# Altium PCB PCB2.PcbDoc (part 7 of 7)
Units mm, origin at the board's own origin, x right, y up, seen from the top; angles counter-clockwise.
Board outline 49 x 45 mm, 6 copper layers (Component Side, GND1, 3.3V, 1.2V, GND2, Solder Side), stack 1.629 mm thick; 56 components, 116 nets, 925 pads, 478 vias.
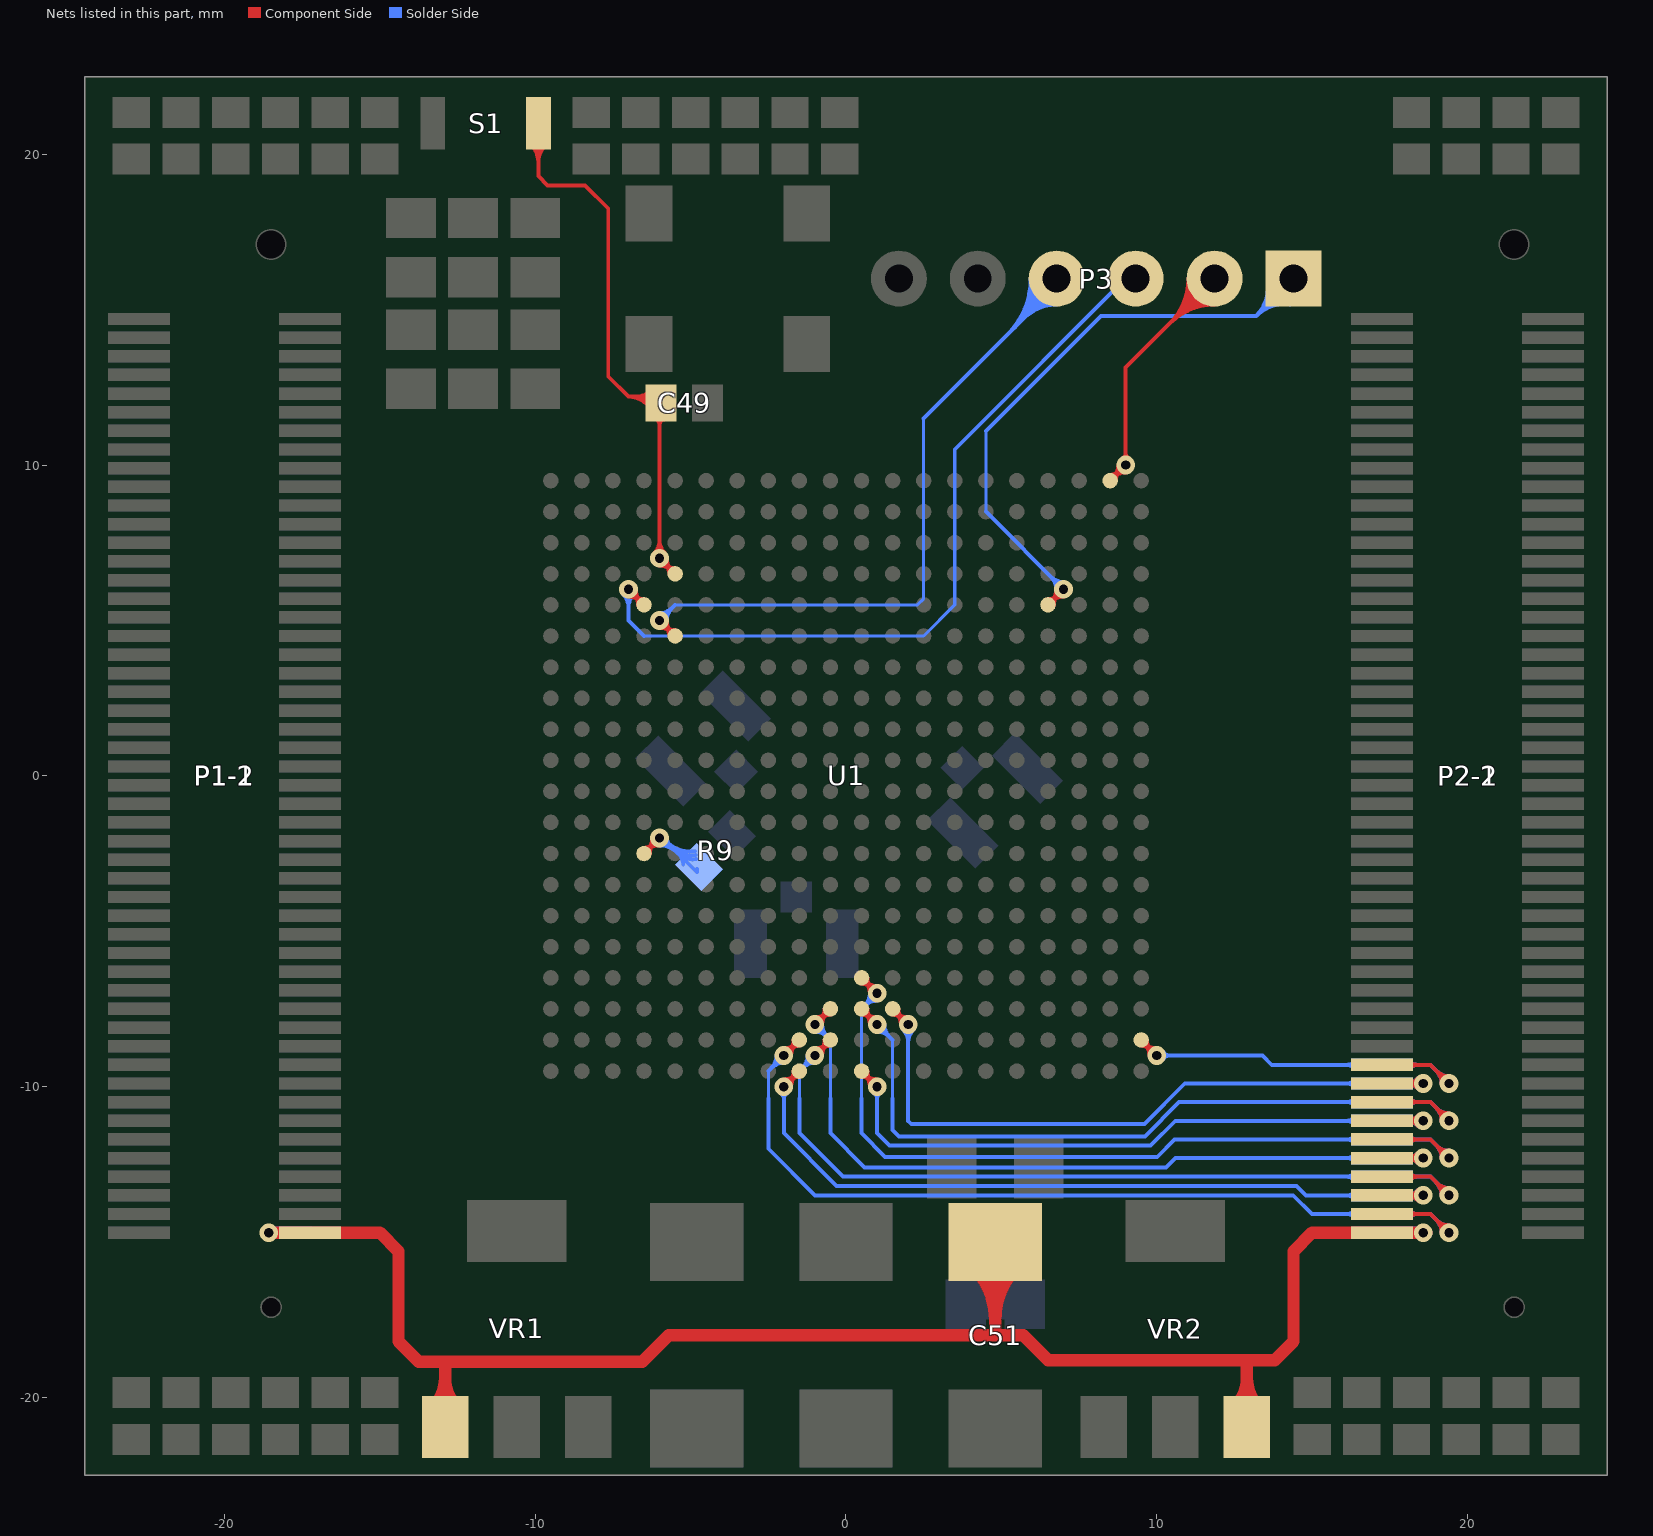
[diagram p11: the nets of this part, all layers, seen from the top]

## Via types
v1: diameter 0.6, hole 0.3, Component Side to Solder Side, tented both sides, 462 vias
v2: diameter 1.5, hole 0.8, Component Side to Solder Side, 10 vias
v3: diameter 1.2, hole 0.6, Component Side to Solder Side, 6 vias

## Nets (pads, with @x,y where several pads share a name; then routed paths per layer and width w, separated by ;. In a path a pad name is that pad's centre, name@x,y a point inside that pad or via, vN(x,y) a via of type N, cw(c..) or ccw(c..) an arc to the next point about the centre after c; other vN are vias at no path point) (continued)
P2-81: P2-1.81 P2-2.81 U1.W20 | length 23.6
  Component Side w0.127: U1.W20@9.5,-8.5 v1(10,-9) ; P2-1.81@17.25,-9.3 18.804,-9.3 v1(19.404,-9.9) ; U1.W20@9.596,-8.596 ccw(c10,-8.193) 10,-8.764 cw(c10,-8.193) U1.W20@9.596,-8.596 ; U1.W20@9.596,-8.596 cw(c9.193,-9) 9.764,-9 ccw(c9.193,-9) U1.W20@9.596,-8.596 ; v1@9.818,-8.818 ccw(c9.5,-9.137) 9.5,-8.686 cw(c9.5,-9.137) v1@9.818,-8.818 ; v1@9.818,-8.818 cw(c10.137,-8.5) 9.687,-8.5 ccw(c10.137,-8.5) v1@9.818,-8.818 ; 18.38,-9.3 ccw(c18.38,-9.63) 18.147,-9.397 cw(c18.38,-9.63) 18.38,-9.3 ; 18.38,-9.3 cw(c18.38,-8.97) 18.147,-9.203 ccw(c18.38,-8.97) 18.38,-9.3 ; 19,-9.496 ccw(c19.404,-9.093) 19.404,-9.664 cw(c19.404,-9.093) 19,-9.496 ; 19,-9.496 cw(c18.597,-9.9) 19.168,-9.9 ccw(c18.597,-9.9) 19,-9.496
  Solder Side w0.127: v1(10,-9) 10.385,-9 ; v1(19.404,-9.9) 18.804,-9.3 P2-2.81@17.25,-9.3 13.7,-9.3 13.4,-9 11.5,-9 10.385,-9 ; 10.385,-9 ccw(c10.385,-9.195) 10.211,-9.107 cw(c10.385,-9.195) 10.385,-9 ; 10.385,-9 cw(c10.385,-8.805) 10.211,-8.893 ccw(c10.385,-8.805) 10.385,-9 ; 16.12,-9.3 ccw(c16.12,-8.97) 16.353,-9.203 cw(c16.12,-8.97) 16.12,-9.3 ; 16.12,-9.3 cw(c16.12,-9.63) 16.353,-9.397 ccw(c16.12,-9.63) 16.12,-9.3 ; 18.38,-9.3 ccw(c18.38,-9.63) 18.147,-9.397 cw(c18.38,-9.63) 18.38,-9.3 ; 18.38,-9.3 cw(c18.38,-8.97) 18.147,-9.203 ccw(c18.38,-8.97) 18.38,-9.3 ; 19,-9.496 ccw(c19.404,-9.093) 19.404,-9.664 cw(c19.404,-9.093) 19,-9.496 ; 19,-9.496 cw(c18.597,-9.9) 19.168,-9.9 ccw(c18.597,-9.9) 19,-9.496
P2-83: P2-1.83 P2-2.83 U1.V12 | length 34.2
  Component Side w0.127: U1.V12@1.5,-7.5 v1(2,-8) ; P2-1.83@17.25,-9.9 v1(18.577,-9.9) v1@18.677,-9.9 ; U1.V12@1.596,-7.596 ccw(c2,-7.193) 2,-7.764 cw(c2,-7.193) U1.V12@1.596,-7.596 ; U1.V12@1.596,-7.596 cw(c1.193,-8) 1.764,-8 ccw(c1.193,-8) U1.V12@1.596,-7.596 ; v1@1.818,-7.818 ccw(c1.5,-8.137) 1.5,-7.686 cw(c1.5,-8.137) v1@1.818,-7.818 ; v1@1.818,-7.818 cw(c2.137,-7.5) 1.686,-7.5 ccw(c2.137,-7.5) v1@1.818,-7.818 ; P2-1.83@18.006,-9.9 ccw(c18.006,-9.329) 18.41,-9.733 cw(c18.006,-9.329) P2-1.83@18.006,-9.9 ; P2-1.83@18.006,-9.9 cw(c18.006,-10.471) 18.41,-10.067 ccw(c18.006,-10.471) P2-1.83@18.006,-9.9 ; v1@18.38,-9.9 ccw(c18.38,-10.23) 18.147,-9.997 cw(c18.38,-10.23) v1@18.38,-9.9 ; v1@18.38,-9.9 cw(c18.38,-9.57) 18.147,-9.803 ccw(c18.38,-9.57) v1@18.38,-9.9
  Solder Side w0.127: v1(2,-8) 2,-10.385 2,-11.1 2.1,-11.2 9.6,-11.2 10.9,-9.9 P2-2.83@17.25,-9.9 v1(18.577,-9.9) v1@18.677,-9.9 ; 2,-8.571 ccw(c1.429,-8.571) 1.833,-8.167 cw(c1.429,-8.571) 2,-8.571 ; 2,-8.571 cw(c2.571,-8.571) 2.167,-8.167 ccw(c2.571,-8.571) 2,-8.571 ; 16.12,-9.9 ccw(c16.12,-9.57) 16.353,-9.803 cw(c16.12,-9.57) 16.12,-9.9 ; 16.12,-9.9 cw(c16.12,-10.23) 16.353,-9.997 ccw(c16.12,-10.23) 16.12,-9.9 ; P2-2.83@18.006,-9.9 ccw(c18.006,-9.329) 18.41,-9.733 cw(c18.006,-9.329) P2-2.83@18.006,-9.9 ; P2-2.83@18.006,-9.9 cw(c18.006,-10.471) 18.41,-10.067 ccw(c18.006,-10.471) P2-2.83@18.006,-9.9 ; v1@18.38,-9.9 ccw(c18.38,-10.23) 18.147,-9.997 cw(c18.38,-10.23) v1@18.38,-9.9 ; v1@18.38,-9.9 cw(c18.38,-9.57) 18.147,-9.803 ccw(c18.38,-9.57) v1@18.38,-9.9
P2-85: P2-1.85 P2-2.85 U1.V11 | length 39.9
  Component Side w0.127: U1.V11@0.5,-7.5 v1(1,-8) ; P2-1.85@17.25,-10.5 18.804,-10.5 v1(19.404,-11.1) ; U1.V11@0.596,-7.596 ccw(c1,-7.193) 1,-7.764 cw(c1,-7.193) U1.V11@0.596,-7.596 ; U1.V11@0.596,-7.596 cw(c0.193,-8) 0.764,-8 ccw(c0.193,-8) U1.V11@0.596,-7.596 ; v1@0.818,-7.818 ccw(c0.5,-8.137) 0.5,-7.686 cw(c0.5,-8.137) v1@0.818,-7.818 ; v1@0.818,-7.818 cw(c1.137,-7.5) 0.686,-7.5 ccw(c1.137,-7.5) v1@0.818,-7.818 ; 18.38,-10.5 ccw(c18.38,-10.83) 18.147,-10.597 cw(c18.38,-10.83) 18.38,-10.5 ; 18.38,-10.5 cw(c18.38,-10.17) 18.147,-10.403 ccw(c18.38,-10.17) 18.38,-10.5 ; 19,-10.696 ccw(c19.404,-10.293) 19.404,-10.864 cw(c19.404,-10.293) 19,-10.696 ; 19,-10.696 cw(c18.597,-11.1) 19.168,-11.1 ccw(c18.597,-11.1) 19,-10.696
  Solder Side w0.1: 1.5,-10.385 1.5,-8.5
  Solder Side w0.127: v1(1,-8) 1.5,-8.5 ; 1.5,-10.385 1.5,-11.1 1.5,-11.4 1.7,-11.6 9.615,-11.6 10.715,-10.5 P2-2.85@17.25,-10.5 ; P2-2.85@17.2,-10.5 P2-2.85@17.25,-10.5 ; P2-2.85@17.25,-10.4 P2-2.85@17.25,-10.5 ; 1.404,-8.404 ccw(c1,-8.807) 1,-8.237 cw(c1,-8.807) 1.404,-8.404 ; 1.404,-8.404 cw(c1.807,-8) 1.237,-8 ccw(c1.807,-8) 1.404,-8.404 ; 16.12,-10.5 ccw(c16.12,-10.17) 16.353,-10.403 cw(c16.12,-10.17) 16.12,-10.5 ; 16.12,-10.5 cw(c16.12,-10.83) 16.353,-10.597 ccw(c16.12,-10.83) 16.12,-10.5 ; P2-2.85@17.25,-10.5 18.804,-10.5 ; 18.38,-10.5 ccw(c18.38,-10.83) 18.147,-10.597 cw(c18.38,-10.83) 18.38,-10.5 ; 18.38,-10.5 cw(c18.38,-10.17) 18.147,-10.403 ccw(c18.38,-10.17) 18.38,-10.5 ; 18.804,-10.5 v1(19.404,-11.1) 18.804,-10.5 ; 19,-10.696 ccw(c19.404,-10.293) v1@19.404,-10.864 ; 19,-10.696 cw(c18.597,-11.1) v1@19.168,-11.1 ; 19,-10.696 ccw(c19.404,-10.293) v1@19.404,-10.864 ; 19,-10.696 cw(c18.597,-11.1) v1@19.168,-11.1 ; 19,-10.696 ccw(c19.404,-10.293) v1@19.404,-10.864 ; 19,-10.696 cw(c18.597,-11.1) v1@19.168,-11.1 ; 19,-10.696 ccw(c19.404,-10.293) v1@19.404,-10.864 ; 19,-10.696 cw(c18.597,-11.1) v1@19.168,-11.1
P2-87: P2-1.87 P2-2.87 U1.Y11 | length 36.8
  Component Side w0.127: U1.Y11@0.5,-9.5 v1(1,-10) ; P2-1.87@17.25,-11.1 v1(18.577,-11.1) v1@18.677,-11.1 ; U1.Y11@0.596,-9.596 ccw(c1,-9.193) 1,-9.764 cw(c1,-9.193) U1.Y11@0.596,-9.596 ; U1.Y11@0.596,-9.596 cw(c0.193,-10) 0.764,-10 ccw(c0.193,-10) U1.Y11@0.596,-9.596 ; v1@0.818,-9.818 ccw(c0.5,-10.137) 0.5,-9.686 cw(c0.5,-10.137) v1@0.818,-9.818 ; v1@0.818,-9.818 cw(c1.137,-9.5) 0.686,-9.5 ccw(c1.137,-9.5) v1@0.818,-9.818 ; P2-1.87@18.006,-11.1 ccw(c18.006,-10.529) 18.41,-10.933 cw(c18.006,-10.529) P2-1.87@18.006,-11.1 ; P2-1.87@18.006,-11.1 cw(c18.006,-11.671) 18.41,-11.267 ccw(c18.006,-11.671) P2-1.87@18.006,-11.1 ; v1@18.38,-11.1 ccw(c18.38,-11.43) 18.147,-11.197 cw(c18.38,-11.43) v1@18.38,-11.1 ; v1@18.38,-11.1 cw(c18.38,-10.77) 18.147,-11.003 ccw(c18.38,-10.77) v1@18.38,-11.1
  Solder Side w0.127: v1(1,-10) 1,-10.385 ; 1,-10.385 ccw(c0.805,-10.385) 0.893,-10.211 cw(c0.805,-10.385) 1,-10.385 ; 1,-10.385 cw(c1.195,-10.385) 1.107,-10.211 ccw(c1.195,-10.385) 1,-10.385 ; 1,-10.385 1,-11.2 1,-11.5 1.4,-11.9 9.8,-11.9 10.6,-11.1 P2-2.87@17.25,-11.1 ; 16.12,-11.1 ccw(c16.12,-10.77) 16.353,-11.003 cw(c16.12,-10.77) 16.12,-11.1 ; 16.12,-11.1 cw(c16.12,-11.43) 16.353,-11.197 ccw(c16.12,-11.43) 16.12,-11.1 ; P2-2.87@17.25,-11.1 v1(18.577,-11.1) ; P2-2.87@17.25,-11.1 v1(18.577,-11.1) ; P2-2.87@18.006,-11.1 ccw(c18.006,-10.529) v1@18.41,-10.933 ; P2-2.87@18.006,-11.1 cw(c18.006,-11.671) v1@18.41,-11.267 ; P2-2.87@18.006,-11.1 ccw(c18.006,-10.529) v1@18.41,-10.933 ; P2-2.87@18.006,-11.1 cw(c18.006,-11.671) v1@18.41,-11.267 ; P2-2.87@18.006,-11.1 ccw(c18.006,-10.529) v1@18.41,-10.933 ; P2-2.87@18.006,-11.1 cw(c18.006,-11.671) v1@18.41,-11.267 ; P2-2.87@18.006,-11.1 ccw(c18.006,-10.529) v1@18.41,-10.933 ; P2-2.87@18.006,-11.1 cw(c18.006,-11.671) v1@18.41,-11.267 ; P2-2.87@18.147,-11.197 cw(c18.38,-11.43) v1@18.38,-11.1 ; P2-2.87@18.147,-11.197 cw(c18.38,-11.43) v1@18.38,-11.1 ; P2-2.87@18.147,-11.197 cw(c18.38,-11.43) v1@18.38,-11.1 ; P2-2.87@18.147,-11.197 cw(c18.38,-11.43) v1@18.38,-11.1 ; P2-2.87@18.147,-11.003 ccw(c18.38,-10.77) v1@18.38,-11.1 ; P2-2.87@18.147,-11.003 ccw(c18.38,-10.77) v1@18.38,-11.1 ; P2-2.87@18.147,-11.003 ccw(c18.38,-10.77) v1@18.38,-11.1 ; P2-2.87@18.147,-11.003 ccw(c18.38,-10.77) v1@18.38,-11.1 ; v1(18.577,-11.1) 18.677,-11.1 v1(18.577,-11.1)
P2-89: P2-1.89 P2-2.89 U1.U11 | length 44.5
  Component Side w0.127: U1.U11@0.5,-6.5 v1(1,-7) ; P2-1.89@17.25,-11.7 18.804,-11.7 v1(19.404,-12.3) ; U1.U11@0.596,-6.596 ccw(c1,-6.193) 1,-6.764 cw(c1,-6.193) U1.U11@0.596,-6.596 ; U1.U11@0.596,-6.596 cw(c0.193,-7) 0.764,-7 ccw(c0.193,-7) U1.U11@0.596,-6.596 ; v1@0.818,-6.818 ccw(c0.5,-7.137) 0.5,-6.686 cw(c0.5,-7.137) v1@0.818,-6.818 ; v1@0.818,-6.818 cw(c1.137,-6.5) 0.686,-6.5 ccw(c1.137,-6.5) v1@0.818,-6.818 ; 18.38,-11.7 ccw(c18.38,-12.03) 18.147,-11.797 cw(c18.38,-12.03) 18.38,-11.7 ; 18.38,-11.7 cw(c18.38,-11.37) 18.147,-11.603 ccw(c18.38,-11.37) 18.38,-11.7 ; 19,-11.896 ccw(c19.404,-11.493) 19.404,-12.064 cw(c19.404,-11.493) 19,-11.896 ; 19,-11.896 cw(c18.597,-12.3) 19.168,-12.3 ccw(c18.597,-12.3) 19,-11.896
  Solder Side w0.1: 0.5,-10.385 0.5,-7.5
  Solder Side w0.127: 0.5,-10.385 0.5,-11.2 0.5,-11.5 1.262,-12.262 10.016,-12.262 10.578,-11.7 P2-2.89@17.25,-11.7 ; 0.5,-7.5 v1(1,-7) ; P2-2.89@17.2,-11.7 P2-2.89@17.25,-11.7 ; 0.596,-7.404 ccw(c0.193,-7) 0.764,-7 cw(c0.193,-7) 0.596,-7.404 ; 0.596,-7.404 cw(c1,-7.807) 1,-7.237 ccw(c1,-7.807) 0.596,-7.404 ; 16.12,-11.7 ccw(c16.12,-11.37) 16.353,-11.603 cw(c16.12,-11.37) 16.12,-11.7 ; 16.12,-11.7 cw(c16.12,-12.03) 16.353,-11.797 ccw(c16.12,-12.03) 16.12,-11.7 ; P2-2.89@17.25,-11.7 18.804,-11.7 ; P2-2.89@17.25,-11.7 18.804,-11.7 ; P2-2.89@18.147,-11.797 cw(c18.38,-12.03) 18.38,-11.7 ; P2-2.89@18.147,-11.797 cw(c18.38,-12.03) 18.38,-11.7 ; P2-2.89@18.147,-11.797 cw(c18.38,-12.03) 18.38,-11.7 ; P2-2.89@18.147,-11.797 cw(c18.38,-12.03) 18.38,-11.7 ; P2-2.89@18.147,-11.603 ccw(c18.38,-11.37) 18.38,-11.7 ; P2-2.89@18.147,-11.603 ccw(c18.38,-11.37) 18.38,-11.7 ; P2-2.89@18.147,-11.603 ccw(c18.38,-11.37) 18.38,-11.7 ; P2-2.89@18.147,-11.603 ccw(c18.38,-11.37) 18.38,-11.7 ; 18.804,-11.7 v1(19.404,-12.3) 18.804,-11.7 ; 19,-11.896 ccw(c19.404,-11.493) v1@19.404,-12.064 ; 19,-11.896 cw(c18.597,-12.3) v1@19.168,-12.3 ; 19,-11.896 ccw(c19.404,-11.493) v1@19.404,-12.064 ; 19,-11.896 cw(c18.597,-12.3) v1@19.168,-12.3 ; 19,-11.896 ccw(c19.404,-11.493) v1@19.404,-12.064 ; 19,-11.896 cw(c18.597,-12.3) v1@19.168,-12.3 ; 19,-11.896 ccw(c19.404,-11.493) v1@19.404,-12.064 ; 19,-11.896 cw(c18.597,-12.3) v1@19.168,-12.3
P2-91: P2-1.91 P2-2.91 U1.V10 | length 41.6
  Component Side w0.127: v1(-1,-8) U1.V10@-0.5,-7.5 ; P2-1.91@17.25,-12.3 v1(18.577,-12.3) v1@18.677,-12.3 ; v1@-0.818,-7.818 ccw(c-1.137,-7.5) -0.687,-7.5 cw(c-1.137,-7.5) v1@-0.818,-7.818 ; v1@-0.818,-7.818 cw(c-0.5,-8.137) -0.5,-7.686 ccw(c-0.5,-8.137) v1@-0.818,-7.818 ; U1.V10@-0.596,-7.596 ccw(c-0.193,-8) -0.764,-8 cw(c-0.193,-8) U1.V10@-0.596,-7.596 ; U1.V10@-0.596,-7.596 cw(c-1,-7.193) -1,-7.764 ccw(c-1,-7.193) U1.V10@-0.596,-7.596 ; P2-1.91@18.006,-12.3 ccw(c18.006,-11.729) 18.41,-12.133 cw(c18.006,-11.729) P2-1.91@18.006,-12.3 ; P2-1.91@18.006,-12.3 cw(c18.006,-12.871) 18.41,-12.467 ccw(c18.006,-12.871) P2-1.91@18.006,-12.3 ; v1@18.38,-12.3 ccw(c18.38,-12.63) 18.147,-12.397 cw(c18.38,-12.63) v1@18.38,-12.3 ; v1@18.38,-12.3 cw(c18.38,-11.97) 18.147,-12.203 ccw(c18.38,-11.97) v1@18.38,-12.3
  Solder Side w0.1: -0.5,-10.385 -0.5,-8.5
  Solder Side w0.127: v1(-1,-8) -0.5,-8.5 ; -0.5,-10.385 -0.5,-11.5 0.6,-12.6 10.3,-12.6 10.6,-12.3 P2-2.91@17.2,-12.3 ; -0.596,-8.404 ccw(c-1,-8.807) -1,-8.237 cw(c-1,-8.807) -0.596,-8.404 ; -0.596,-8.404 cw(c-0.193,-8) -0.764,-8 ccw(c-0.193,-8) -0.596,-8.404 ; 16.12,-12.3 ccw(c16.12,-11.97) 16.353,-12.203 cw(c16.12,-11.97) 16.12,-12.3 ; 16.12,-12.3 cw(c16.12,-12.63) 16.353,-12.397 ccw(c16.12,-12.63) 16.12,-12.3 ; P2-2.91@17.2,-12.3 P2-2.91@17.25,-12.3 ; P2-2.91@17.2,-12.3 P2-2.91@17.25,-12.3 ; P2-2.91@17.25,-12.3 v1(18.577,-12.3) ; P2-2.91@17.25,-12.3 v1(18.577,-12.3) ; P2-2.91@18.006,-12.3 ccw(c18.006,-11.729) v1@18.41,-12.133 ; P2-2.91@18.006,-12.3 cw(c18.006,-12.871) v1@18.41,-12.467 ; P2-2.91@18.006,-12.3 ccw(c18.006,-11.729) v1@18.41,-12.133 ; P2-2.91@18.006,-12.3 cw(c18.006,-12.871) v1@18.41,-12.467 ; P2-2.91@18.006,-12.3 ccw(c18.006,-11.729) v1@18.41,-12.133 ; P2-2.91@18.006,-12.3 cw(c18.006,-12.871) v1@18.41,-12.467 ; P2-2.91@18.006,-12.3 ccw(c18.006,-11.729) v1@18.41,-12.133 ; P2-2.91@18.006,-12.3 cw(c18.006,-12.871) v1@18.41,-12.467 ; P2-2.91@18.147,-12.397 cw(c18.38,-12.63) v1@18.38,-12.3 ; P2-2.91@18.147,-12.397 cw(c18.38,-12.63) v1@18.38,-12.3 ; P2-2.91@18.147,-12.397 cw(c18.38,-12.63) v1@18.38,-12.3 ; P2-2.91@18.147,-12.397 cw(c18.38,-12.63) v1@18.38,-12.3 ; P2-2.91@18.147,-12.203 ccw(c18.38,-11.97) v1@18.38,-12.3 ; P2-2.91@18.147,-12.203 ccw(c18.38,-11.97) v1@18.38,-12.3 ; P2-2.91@18.147,-12.203 ccw(c18.38,-11.97) v1@18.38,-12.3 ; P2-2.91@18.147,-12.203 ccw(c18.38,-11.97) v1@18.38,-12.3 ; v1(18.577,-12.3) 18.677,-12.3 v1(18.577,-12.3)
P2-93: P2-1.93 P2-2.93 U1.W10 | length 44.5
  Component Side w0.127: v1(-1,-9) U1.W10@-0.5,-8.5 ; P2-1.93@17.25,-12.9 18.804,-12.9 v1(19.404,-13.5) ; v1@-0.818,-8.818 ccw(c-1.137,-8.5) -0.687,-8.5 cw(c-1.137,-8.5) v1@-0.818,-8.818 ; v1@-0.818,-8.818 cw(c-0.5,-9.137) -0.5,-8.686 ccw(c-0.5,-9.137) v1@-0.818,-8.818 ; U1.W10@-0.596,-8.596 ccw(c-0.193,-9) -0.764,-9 cw(c-0.193,-9) U1.W10@-0.596,-8.596 ; U1.W10@-0.596,-8.596 cw(c-1,-8.193) -1,-8.764 ccw(c-1,-8.193) U1.W10@-0.596,-8.596 ; 18.38,-12.9 ccw(c18.38,-13.23) 18.147,-12.997 cw(c18.38,-13.23) 18.38,-12.9 ; 18.38,-12.9 cw(c18.38,-12.57) 18.147,-12.803 ccw(c18.38,-12.57) 18.38,-12.9 ; 19,-13.096 ccw(c19.404,-12.693) 19.404,-13.264 cw(c19.404,-12.693) 19,-13.096 ; 19,-13.096 cw(c18.597,-13.5) 19.168,-13.5 ccw(c18.597,-13.5) 19,-13.096
  Solder Side w0.1: -1.5,-10.385 -1.5,-9.5
  Solder Side w0.127: -1.5,-10.385 -1.5,-11.5 -0.1,-12.9 P2-2.93@17.25,-12.9 ; -1.5,-9.5 v1(-1,-9) ; P2-2.93@17.2,-12.9 P2-2.93@17.25,-12.9 ; -1.404,-9.404 ccw(c-1.807,-9) -1.237,-9 cw(c-1.807,-9) -1.404,-9.404 ; -1.404,-9.404 cw(c-1,-9.807) -1,-9.237 ccw(c-1,-9.807) -1.404,-9.404 ; 16.12,-12.9 ccw(c16.12,-12.57) 16.353,-12.803 cw(c16.12,-12.57) 16.12,-12.9 ; 16.12,-12.9 cw(c16.12,-13.23) 16.353,-12.997 ccw(c16.12,-13.23) 16.12,-12.9 ; P2-2.93@17.25,-12.9 18.804,-12.9 ; P2-2.93@17.25,-12.9 18.804,-12.9 ; P2-2.93@18.147,-12.997 cw(c18.38,-13.23) 18.38,-12.9 ; P2-2.93@18.147,-12.997 cw(c18.38,-13.23) 18.38,-12.9 ; P2-2.93@18.147,-12.997 cw(c18.38,-13.23) 18.38,-12.9 ; P2-2.93@18.147,-12.997 cw(c18.38,-13.23) 18.38,-12.9 ; P2-2.93@18.147,-12.803 ccw(c18.38,-12.57) 18.38,-12.9 ; P2-2.93@18.147,-12.803 ccw(c18.38,-12.57) 18.38,-12.9 ; P2-2.93@18.147,-12.803 ccw(c18.38,-12.57) 18.38,-12.9 ; P2-2.93@18.147,-12.803 ccw(c18.38,-12.57) 18.38,-12.9 ; 18.804,-12.9 v1(19.404,-13.5) 18.804,-12.9 ; 19,-13.096 ccw(c19.404,-12.693) v1@19.404,-13.264 ; 19,-13.096 cw(c18.597,-13.5) v1@19.168,-13.5 ; 19,-13.096 ccw(c19.404,-12.693) v1@19.404,-13.264 ; 19,-13.096 cw(c18.597,-13.5) v1@19.168,-13.5 ; 19,-13.096 ccw(c19.404,-12.693) v1@19.404,-13.264 ; 19,-13.096 cw(c18.597,-13.5) v1@19.168,-13.5 ; 19,-13.096 ccw(c19.404,-12.693) v1@19.404,-13.264 ; 19,-13.096 cw(c18.597,-13.5) v1@19.168,-13.5
P2-95: P2-1.95 P2-2.95 U1.Y9 | length 40.2
  Component Side w0.127: v1(-2,-10) U1.Y9@-1.5,-9.5 ; P2-1.95@17.25,-13.5 v1(18.577,-13.5) v1@18.677,-13.5 ; v1@-1.818,-9.818 ccw(c-2.137,-9.5) -1.687,-9.5 cw(c-2.137,-9.5) v1@-1.818,-9.818 ; v1@-1.818,-9.818 cw(c-1.5,-10.137) -1.5,-9.686 ccw(c-1.5,-10.137) v1@-1.818,-9.818 ; U1.Y9@-1.596,-9.596 ccw(c-1.193,-10) -1.764,-10 cw(c-1.193,-10) U1.Y9@-1.596,-9.596 ; U1.Y9@-1.596,-9.596 cw(c-2,-9.193) -2,-9.764 ccw(c-2,-9.193) U1.Y9@-1.596,-9.596 ; P2-1.95@18.006,-13.5 ccw(c18.006,-12.929) 18.41,-13.333 cw(c18.006,-12.929) P2-1.95@18.006,-13.5 ; P2-1.95@18.006,-13.5 cw(c18.006,-14.071) 18.41,-13.667 ccw(c18.006,-14.071) P2-1.95@18.006,-13.5 ; v1@18.38,-13.5 ccw(c18.38,-13.83) 18.147,-13.597 cw(c18.38,-13.83) v1@18.38,-13.5 ; v1@18.38,-13.5 cw(c18.38,-13.17) 18.147,-13.403 ccw(c18.38,-13.17) v1@18.38,-13.5
  Solder Side w0.127: v1(-2,-10) -2,-10.385 ; -2,-10.385 ccw(c-2.195,-10.385) -2.107,-10.211 cw(c-2.195,-10.385) -2,-10.385 ; -2,-10.385 cw(c-1.805,-10.385) -1.893,-10.211 ccw(c-1.805,-10.385) -2,-10.385 ; -2,-10.385 -2,-11.5 -0.3,-13.2 14.5,-13.2 14.8,-13.5 P2-2.95@17.25,-13.5 ; 16.12,-13.5 ccw(c16.12,-13.17) 16.353,-13.403 cw(c16.12,-13.17) 16.12,-13.5 ; 16.12,-13.5 cw(c16.12,-13.83) 16.353,-13.597 ccw(c16.12,-13.83) 16.12,-13.5 ; P2-2.95@17.25,-13.5 v1(18.577,-13.5) ; P2-2.95@17.25,-13.5 v1(18.577,-13.5) ; P2-2.95@18.006,-13.5 ccw(c18.006,-12.929) v1@18.41,-13.333 ; P2-2.95@18.006,-13.5 cw(c18.006,-14.071) v1@18.41,-13.667 ; P2-2.95@18.006,-13.5 ccw(c18.006,-12.929) v1@18.41,-13.333 ; P2-2.95@18.006,-13.5 cw(c18.006,-14.071) v1@18.41,-13.667 ; P2-2.95@18.006,-13.5 ccw(c18.006,-12.929) v1@18.41,-13.333 ; P2-2.95@18.006,-13.5 cw(c18.006,-14.071) v1@18.41,-13.667 ; P2-2.95@18.006,-13.5 ccw(c18.006,-12.929) v1@18.41,-13.333 ; P2-2.95@18.006,-13.5 cw(c18.006,-14.071) v1@18.41,-13.667 ; P2-2.95@18.147,-13.597 cw(c18.38,-13.83) v1@18.38,-13.5 ; P2-2.95@18.147,-13.597 cw(c18.38,-13.83) v1@18.38,-13.5 ; P2-2.95@18.147,-13.597 cw(c18.38,-13.83) v1@18.38,-13.5 ; P2-2.95@18.147,-13.597 cw(c18.38,-13.83) v1@18.38,-13.5 ; P2-2.95@18.147,-13.403 ccw(c18.38,-13.17) v1@18.38,-13.5 ; P2-2.95@18.147,-13.403 ccw(c18.38,-13.17) v1@18.38,-13.5 ; P2-2.95@18.147,-13.403 ccw(c18.38,-13.17) v1@18.38,-13.5 ; P2-2.95@18.147,-13.403 ccw(c18.38,-13.17) v1@18.38,-13.5 ; v1(18.577,-13.5) 18.677,-13.5 v1(18.577,-13.5)
P2-97: P2-1.97 P2-2.97 U1.W9 | length 41.2
  Component Side w0.127: v1(-2,-9) U1.W9@-1.5,-8.5 ; P2-1.97@17.25,-14.1 18.804,-14.1 v1(19.404,-14.7) ; v1@-1.818,-8.818 ccw(c-2.137,-8.5) -1.687,-8.5 cw(c-2.137,-8.5) v1@-1.818,-8.818 ; v1@-1.818,-8.818 cw(c-1.5,-9.137) -1.5,-8.686 ccw(c-1.5,-9.137) v1@-1.818,-8.818 ; U1.W9@-1.596,-8.596 ccw(c-1.193,-9) -1.764,-9 cw(c-1.193,-9) U1.W9@-1.596,-8.596 ; U1.W9@-1.596,-8.596 cw(c-2,-8.193) -2,-8.764 ccw(c-2,-8.193) U1.W9@-1.596,-8.596 ; 18.38,-14.1 ccw(c18.38,-14.43) 18.147,-14.197 cw(c18.38,-14.43) 18.38,-14.1 ; 18.38,-14.1 cw(c18.38,-13.77) 18.147,-14.003 ccw(c18.38,-13.77) 18.38,-14.1 ; 19,-14.296 ccw(c19.404,-13.893) 19.404,-14.464 cw(c19.404,-13.893) 19,-14.296 ; 19,-14.296 cw(c18.597,-14.7) 19.168,-14.7 ccw(c18.597,-14.7) 19,-14.296
  Solder Side w0.1: -2.5,-10.385 -2.5,-9.5
  Solder Side w0.127: -2.5,-10.385 -2.5,-11.5 -2.5,-12 -1,-13.5 14.392,-13.5 14.992,-14.1 P2-2.97@17.25,-14.1 ; -2.5,-9.5 v1(-2,-9) ; P2-2.97@17.15,-14.2 P2-2.97@17.25,-14.1 ; P2-2.97@17.2,-14.1 P2-2.97@17.25,-14.1 ; v1(19.404,-14.7) 18.804,-14.1 P2-2.97@17.25,-14.1 ; -2.404,-9.404 ccw(c-2.807,-9) -2.237,-9 cw(c-2.807,-9) -2.404,-9.404 ; -2.404,-9.404 cw(c-2,-9.807) -2,-9.237 ccw(c-2,-9.807) -2.404,-9.404 ; 16.12,-14.1 ccw(c16.12,-13.77) 16.353,-14.003 cw(c16.12,-13.77) 16.12,-14.1 ; 16.12,-14.1 cw(c16.12,-14.43) 16.353,-14.197 ccw(c16.12,-14.43) 16.12,-14.1 ; 18.38,-14.1 ccw(c18.38,-14.43) 18.147,-14.197 cw(c18.38,-14.43) 18.38,-14.1 ; 18.38,-14.1 cw(c18.38,-13.77) 18.147,-14.003 ccw(c18.38,-13.77) 18.38,-14.1 ; 19,-14.296 ccw(c19.404,-13.893) 19.404,-14.464 cw(c19.404,-13.893) 19,-14.296 ; 19,-14.296 cw(c18.597,-14.7) 19.168,-14.7 ccw(c18.597,-14.7) 19,-14.296
PROG_B: C49.2 S1.2 U1.D5 | length 33
  Component Side w0.127: S1.2@-9.9,20.6 -9.9,19.3 -9.6,19 -8.4,19 -7.65,18.25 -7.65,12.85 -7,12.2 ; C49.2@-6,12.15 -6,12 -6,11.3 -6,10.385 v1(-6,7) U1.D5@-5.5,6.5 ; C49.2@-5.95,12.2 -7,12.2 ; -9.9,19.738 ccw(c-10.712,19.738) -10.138,20.312 cw(c-10.712,19.738) -9.9,19.738 ; -9.9,19.738 cw(c-9.088,19.738) -9.662,20.312 ccw(c-9.088,19.738) -9.9,19.738 ; -9.9,20.044 ccw(c-10.406,20.044) -10.048,20.402 cw(c-10.406,20.044) -9.9,20.044 ; -9.9,20.044 cw(c-9.394,20.044) -9.752,20.402 ccw(c-9.394,20.044) -9.9,20.044 ; -7,12.2 cw(c-7,11.341) -6.304,11.844 ccw(c-7,11.341) -7,12.2 ; -6,7.571 ccw(c-5.429,7.571) -5.833,7.167 cw(c-5.429,7.571) -6,7.571 ; -6,7.571 cw(c-6.571,7.571) -6.167,7.167 ccw(c-6.571,7.571) -6,7.571 ; -6,11.298 ccw(c-6.226,11.298) -6.132,11.503 cw(c-6.226,11.298) -6,11.298 ; -6,11.298 cw(c-5.821,11.298) -5.858,11.473 ccw(c-5.821,11.298) -6,11.298 ; v1@-5.818,6.818 ccw(c-5.5,7.137) -5.5,6.686 cw(c-5.5,7.137) v1@-5.818,6.818 ; v1@-5.818,6.818 cw(c-6.137,6.5) -5.687,6.5 ccw(c-6.137,6.5) v1@-5.818,6.818 ; U1.D5@-5.596,6.596 ccw(c-6,6.193) -6,6.764 cw(c-6,6.193) U1.D5@-5.596,6.596 ; U1.D5@-5.596,6.596 cw(c-5.193,7) -5.764,7 ccw(c-5.193,7) U1.D5@-5.596,6.596 ; -6.762,12.2 ccw(c-6.762,12.912) -6.259,12.409 cw(c-6.762,12.912) -6.762,12.2 ; -6.751,12.2 cw(c-6.751,11.521) -6.201,11.919 ccw(c-6.751,11.521) -6.751,12.2 ; -6.503,12.2 cw(c-6.503,11.7) -6.098,11.993 ccw(c-6.503,11.7) -6.503,12.2 ; -6.456,12.2 ccw(c-6.456,12.606) -6.169,12.319 cw(c-6.456,12.606) -6.456,12.2
  Component Side w0.203: C49.2@-6,12.15 C49.2@-5.95,12.2
TCK: P3.2 U1.A19 | length 31.6
  Component Side w0.127: U1.A19@8.5,9.5 v1(9,10) 9,10.385 ; P3.2@11.86,16 9,13.14 9,10.9 9,10.385 ; U1.A19@8.596,9.596 ccw(c8.193,10) 8.764,10 cw(c8.193,10) U1.A19@8.596,9.596 ; U1.A19@8.596,9.596 cw(c9,9.193) 9,9.764 ccw(c9,9.193) U1.A19@8.596,9.596 ; v1@8.818,9.818 ccw(c9.137,9.5) 8.687,9.5 cw(c9.137,9.5) v1@8.818,9.818 ; v1@8.818,9.818 cw(c8.5,10.137) 8.5,9.686 ccw(c8.5,10.137) v1@8.818,9.818 ; 9,10.385 ccw(c9.195,10.385) 9.107,10.211 cw(c9.195,10.385) 9,10.385 ; 9,10.385 cw(c8.805,10.385) 8.893,10.211 ccw(c8.805,10.385) 9,10.385 ; 10.432,14.572 ccw(c9.004,16) 11.023,16 cw(c9.004,16) 10.432,14.572 ; 10.432,14.572 cw(c11.86,13.144) 11.86,15.164 ccw(c11.86,13.144) 10.432,14.572 ; 10.649,14.789 ccw(c9.438,16) 11.15,16 cw(c9.438,16) 10.649,14.789 ; 10.649,14.789 cw(c11.86,13.578) 11.86,15.291 ccw(c11.86,13.578) 10.649,14.789 ; 10.866,15.006 ccw(c9.871,16) 11.277,16 cw(c9.871,16) 10.866,15.006 ; 10.866,15.006 cw(c11.86,14.011) 11.86,15.418 ccw(c11.86,14.011) 10.866,15.006 ; 11.082,15.222 ccw(c10.305,16) 11.404,16 cw(c10.305,16) 11.082,15.222 ; 11.082,15.222 cw(c11.86,14.445) 11.86,15.545 ccw(c11.86,14.445) 11.082,15.222
TDI: P3.4 U1.F5 | length 47.4
  Component Side w0.127: v1(-6,5) U1.F5@-5.5,4.5 ; v1@-5.818,4.818 ccw(c-5.5,5.137) -5.5,4.686 cw(c-5.5,5.137) v1@-5.818,4.818 ; v1@-5.818,4.818 cw(c-6.137,4.5) -5.687,4.5 ccw(c-6.137,4.5) v1@-5.818,4.818 ; U1.F5@-5.596,4.596 ccw(c-6,4.193) -6,4.764 cw(c-6,4.193) U1.F5@-5.596,4.596 ; U1.F5@-5.596,4.596 cw(c-5.193,5) -5.764,5 ccw(c-5.193,5) U1.F5@-5.596,4.596
  Solder Side w0.1: -5.5,5.5 2.3,5.5 2.5,5.7 2.5,11.5
  Solder Side w0.127: v1(-6,5) -5.5,5.5 ; 2.5,11.5 6.78,15.78 P3.4@6.78,16 ; -5.596,5.404 ccw(c-5.193,5) -5.764,5 cw(c-5.193,5) -5.596,5.404 ; -5.596,5.404 cw(c-6,5.807) -6,5.237 ccw(c-6,5.807) -5.596,5.404 ; 5.196,14.196 ccw(c3.393,16) 5.943,16 cw(c3.393,16) 5.196,14.196 ; 5.413,14.413 ccw(c3.826,16) 6.07,16 cw(c3.826,16) 5.413,14.413 ; 5.63,14.63 ccw(c4.26,16) 6.197,16 cw(c4.26,16) 5.63,14.63 ; 5.728,14.728 cw(c6.78,13.675) 6.78,15.164 ccw(c6.78,13.675) 5.728,14.728 ; 5.847,14.847 ccw(c4.694,16) 6.324,16 cw(c4.694,16) 5.847,14.847 ; 5.944,14.944 cw(c6.78,14.109) 6.78,15.291 ccw(c6.78,14.109) 5.944,14.944 ; 6.064,15.064 ccw(c5.127,16) 6.451,16 cw(c5.127,16) 6.064,15.064 ; 6.161,15.161 cw(c6.78,14.542) 6.78,15.418 ccw(c6.78,14.542) 6.161,15.161
TDO: P3.1 U1.E17 | length 38.5
  Component Side w0.127: U1.E17@6.5,5.5 v1(7,6) ; U1.E17@6.596,5.596 ccw(c6.193,6) 6.764,6 cw(c6.193,6) U1.E17@6.596,5.596 ; U1.E17@6.596,5.596 cw(c7,5.193) 7,5.764 ccw(c7,5.193) U1.E17@6.596,5.596 ; v1@6.818,5.818 ccw(c7.137,5.5) 6.687,5.5 cw(c7.137,5.5) v1@6.818,5.818 ; v1@6.818,5.818 cw(c6.5,6.137) 6.5,5.686 ccw(c6.5,6.137) v1@6.818,5.818
  Solder Side w0.1: 4.5,8.5 4.5,11.1
  Solder Side w0.127: 4.5,8.5 v1(7,6) ; 4.5,11.1 8.2,14.8 13.2,14.8 ; P3.1@14.4,16 13.2,14.8 ; 6.596,6.404 ccw(c7,6.807) 7,6.237 cw(c7,6.807) 6.596,6.404 ; 6.596,6.404 cw(c6.193,6) 6.764,6 ccw(c6.193,6) 6.596,6.404 ; 13.2,14.8 ccw(c12.279,15.721) 13.571,15.891 cw(c12.279,15.721) 13.2,14.8 ; 13.2,14.8 cw(c14.121,13.879) 14.291,15.171 ccw(c14.121,13.879) 13.2,14.8 ; 13.382,14.982 ccw(c12.601,15.764) 13.697,15.908 cw(c12.601,15.764) 13.382,14.982 ; 13.382,14.982 cw(c14.164,14.201) 14.308,15.297 ccw(c14.164,14.201) 13.382,14.982 ; P3.1@13.564,15.164 ccw(c12.923,15.806) 13.822,15.924 cw(c12.923,15.806) P3.1@13.564,15.164 ; P3.1@13.564,15.164 cw(c14.206,14.523) 14.324,15.422 ccw(c14.206,14.523) P3.1@13.564,15.164 ; P3.1@13.747,15.347 ccw(c13.245,15.848) 13.948,15.941 cw(c13.245,15.848) P3.1@13.747,15.347 ; P3.1@13.747,15.347 cw(c14.248,14.845) 14.341,15.548 ccw(c14.248,14.845) P3.1@13.747,15.347
TEST: R9.1 U1.N4 | length 14
  Component Side w0.127: U1.N4@-6.5,-2.5 v1(-6,-2) ; U1.N4@-6.404,-2.404 ccw(c-6.807,-2) -6.237,-2 cw(c-6.807,-2) U1.N4@-6.404,-2.404 ; U1.N4@-6.404,-2.404 cw(c-6,-2.807) -6,-2.237 ccw(c-6,-2.807) U1.N4@-6.404,-2.404 ; v1@-6.182,-2.182 ccw(c-5.863,-2.5) -6.314,-2.5 cw(c-5.863,-2.5) v1@-6.182,-2.182 ; v1@-6.182,-2.182 cw(c-6.5,-1.863) -6.5,-2.313 ccw(c-6.5,-1.863) v1@-6.182,-2.182
  Solder Side w0.127: v1(-6,-2) -5.9,-2 -4.85,-3.05 -4.8,-3.1 R9.1@-4.8,-3 ; v1@-6,-2.237 cw(c-6,-3.049) -5.426,-2.474 ccw(c-6,-3.049) v1@-6,-2.237 ; v1@-6,-2.11 cw(c-6,-2.615) -5.642,-2.258 ccw(c-6,-2.615) v1@-6,-2.11 ; v1@-5.78,-2.12 ccw(c-5.012,-1.352) -4.862,-2.427 cw(c-5.012,-1.352) v1@-5.78,-2.12 ; v1@-5.764,-2 ccw(c-5.434,-2) -5.667,-2.233 cw(c-5.434,-2) v1@-5.764,-2 ; -5.6,-2.3 ccw(c-4.968,-1.668) -4.844,-2.553 cw(c-4.968,-1.668) -5.6,-2.3 ; -5.42,-2.48 ccw(c-4.924,-1.984) -4.826,-2.679 cw(c-4.924,-1.984) -5.42,-2.48 ; -5.377,-2.523 cw(c-5.714,-2.86) -5.238,-2.86 ccw(c-5.714,-2.86) -5.377,-2.523
TMS: P3.3 U1.E4 | length 30.8
  Component Side w0.127: v1(-7,6) U1.E4@-6.5,5.5 ; v1@-6.818,5.818 ccw(c-6.5,6.137) -6.5,5.686 cw(c-6.5,6.137) v1@-6.818,5.818 ; v1@-6.818,5.818 cw(c-7.137,5.5) -6.687,5.5 ccw(c-7.137,5.5) v1@-6.818,5.818 ; U1.E4@-6.596,5.596 ccw(c-7,5.193) -7,5.764 cw(c-7,5.193) U1.E4@-6.596,5.596 ; U1.E4@-6.596,5.596 cw(c-6.193,6) -6.764,6 ccw(c-6.193,6) U1.E4@-6.596,5.596
  Solder Side w0.1: -6.5,4.5 2.5,4.5 3.5,5.5 3.5,10.5
  Solder Side w0.127: v1(-7,6) -7,5 -6.5,4.5 ; 3.5,10.5 P3.3@9.16,16.16 ; -7,5.429 ccw(c-7.571,5.429) -7.167,5.833 cw(c-7.571,5.429) -7,5.429 ; -7,5.429 cw(c-6.429,5.429) -6.833,5.833 ccw(c-6.429,5.429) -7,5.429
VIN: C51.1 P1-1.100 P1-2.100 P2-1.99 P2-2.99 VR1.1 VR2.3 | length 76.1
  Component Side w0.4: v1(-18.577,-14.7) P1-1.100@-17.25,-14.7 -15,-14.7 -14.4,-15.3 -14.4,-18.2 -13.75,-18.85 -12.9,-18.85 ; VR1.1@-12.9,-20.95 -12.9,-18.85 ; C51.1@4.8,-15 4.8,-18 ; VR2.3@12.9,-20.95 12.9,-18.8 ; v1@18.677,-14.7 v1(18.577,-14.7) P2-1.99@17.25,-14.7 15,-14.7 14.4,-15.3 14.4,-18.2 13.8,-18.8 12.9,-18.8 ; -12.9,-19.372 ccw(c-11.572,-19.372) -12.511,-20.311 cw(c-11.572,-19.372) -12.9,-19.372 ; -12.9,-19.372 cw(c-14.228,-19.372) -13.289,-20.311 ccw(c-14.228,-19.372) -12.9,-19.372 ; -12.9,-18.85 -6.55,-18.85 -5.7,-18 4.8,-18 ; 4.8,-18 5.7,-18 6.5,-18.8 12.9,-18.8 ; 4.8,-17.535 ccw(c2.265,-17.535) 4.058,-15.742 cw(c2.265,-17.535) 4.8,-17.535 ; 4.8,-17.535 cw(c7.335,-17.535) 5.542,-15.742 ccw(c7.335,-17.535) 4.8,-17.535 ; 4.8,-16.569 ccw(c3.231,-16.569) 4.34,-15.46 cw(c3.231,-16.569) 4.8,-16.569 ; 4.8,-16.569 cw(c6.369,-16.569) 5.26,-15.46 ccw(c6.369,-16.569) 4.8,-16.569 ; 12.9,-19.372 ccw(c14.228,-19.372) 13.289,-20.311 cw(c14.228,-19.372) 12.9,-19.372 ; 12.9,-19.372 cw(c11.572,-19.372) 12.511,-20.311 ccw(c11.572,-19.372) 12.9,-19.372
  Solder Side w0.127: P1-2.100@-17.25,-14.7 P1-2.100@-17.2,-14.7 ; P2-2.99@17.2,-14.7 P2-2.99@17.25,-14.7
  Solder Side w0.4: v1(-18.577,-14.7) P1-2.100@-17.25,-14.7 ; P2-2.99@17.25,-14.7 v1(18.577,-14.7) v1@18.677,-14.7
pads on no net: P1-1. P1-2. P2-1. P2-2. SB1. U1.A4 U1.A5 U1.A6 U1.A7 U1.A12 U1.A14 U1.B3 U1.B5 U1.B7 U1.B8 U1.B11 U1.B12 U1.B13 U1.B15 U1.C4 U1.C5 U1.C6 U1.C7 U1.C8 U1.C9 U1.C11 U1.C12 U1.C13 U1.C14 U1.C15 U1.C16 U1.D3 U1.D4 U1.D6 U1.D8 U1.D12 U1.D14 U1.D15 U1.D16 U1.D17 U1.E6 U1.E7 U1.E8 U1.E9 U1.E13 U1.E14 U1.E15 U1.E18 U1.F3 U1.F4 U1.F6 U1.F7 U1.F8 U1.F9 U1.F11 U1.F12 U1.F13 U1.F14 U1.F16 U1.F17 U1.G4 U1.G5 U1.G6 U1.G7 U1.G8 U1.G9 U1.G10 U1.G11 U1.G12 U1.G13 U1.G14 U1.G15 U1.G16 U1.G17 U1.G18 U1.H3 U1.H4 U1.H6 U1.H7 U1.H9 U1.H10 U1.H11 U1.H12 U1.H14 U1.H15 U1.H17 U1.H18 U1.J3 U1.J4 U1.J5 U1.J6 U1.J7 U1.J8 U1.J13 U1.J14 U1.J15 U1.J16 U1.J17 U1.J18 U1.K5 U1.K6 U1.K7 U1.K8 U1.K14 U1.K15 U1.K16 U1.L6 U1.L7 U1.L13 U1.L14 U1.L15 U1.L16 U1.M2 U1.M3 U1.M4 U1.M5 U1.M6 U1.M7 U1.M8 U1.M13 U1.M14 U1.M15 U1.M16 U1.M17 U1.M18 U1.N3 U1.N6 U1.N7 U1.N9 U1.N12 U1.N14 U1.N15 U1.N17 U1.N18 U1.P3 U1.P4 U1.P5 U1.P6 U1.P7 U1.P8 U1.P9 U1.P10 U1.P11 U1.P12 U1.P13 U1.P14 U1.P15 U1.P16 U1.P17 U1.P18 U1.R4 U1.R5 U1.R7 U1.R8 U1.R10 U1.R12 U1.R13 U1.R14 U1.R15 U1.R16 U1.R17 U1.R18 U1.T3 U1.T4 U1.T6 U1.T7 U1.T8 U1.T9 U1.T10 U1.T11 U1.T12 U1.T13 U1.T14 U1.T15 U1.T17 U1.U4 U1.U5 U1.U6 U1.U7 U1.U9 U1.U10 U1.U13 U1.U15 U1.U16 U1.U17 U1.U18 U1.V4 U1.V5 U1.V6 U1.V7 U1.V8 U1.V9 U1.V13 U1.V14 U1.V15 U1.V16 U1.V17 U1.W6 U1.W8 U1.W12 U1.W13 U1.W14 U1.W16 U1.W18 U1.W19 U1.Y6 U1.Y7 U1.Y12 U1.Y13 U1.Y14 U1.Y15 U1.Y16 U1.Y17 U1.Y18 U1.Y19 X1.1
copper on no net: | length 0

## Polygon pours and split planes (outlines as drawn)
3.3V on Component Side "PlaneTop" (solid, remove dead copper, pour order 1000): 24,-22 24,22 -24,22 -24,-22
1.2V on Solder Side "PlaneSolderside" (solid, remove dead copper, pour order 1001): 24,-22 24,22 -24,22 -24,-22
GND on GND1 (split plane): 23.99,-21.99 -23.99,-21.99 -23.99,21.99 23.99,21.99
3.3V on 3.3V (split plane): 23.99,-21.99 -23.99,-21.99 -23.99,21.99 23.99,21.99
1.2V on 1.2V (split plane): 23.99,-21.99 -23.99,-21.99 -23.99,21.99 23.99,21.99
GND on GND2 (split plane): 23.99,-21.99 -23.99,-21.99 -23.99,21.99 23.99,21.99

## Other copper
Component Side:
  rectangle net NetC54_1: 7.2,-18.1 14,-13
  rectangle net GND: -14,-18.1 -7.2,-13
Solder Side:
  rectangle net NetC54_1: 9.9,-20.2 11.3,-19
  region net GND: -3.04,1.26 -1.64,2.66 -3.14,4.16 -4.54,2.76
  region net GND: -7,-1.3 -5.333,0.367 -6.133,1.167 -7.8,-0.5
  region net GND: 3.35,-3.75 4.75,-2.35 3.2,-0.8 1.8,-2.2
  region net GND: 6.338,-0.738 7.688,0.612 6.2,2.1 4.85,0.75
  rectangle net GND: -0.6,-6.5 1.4,-5.5
  rectangle net GND: -4.4,-6.5 -2.7,-4.3
  rectangle net NetC54_1: 7.2,-19.05 14,-13.8

## Silkscreen, mask and mechanical layers (free items; w line width, h text height)
Top Overlay:
  drawing of 16 lines, arcs and shapes, not listed
  text "1uF" at -22.6,24 h1 r90
  text "0.1uF" at -20.9,24 h1 r90
  text "0.1uF" at -19.2,24 h1 r90
  text "0.1uF" at -17.58,24 h1 r90
  text "10nF" at -16.1,24 h1 r90
  text "10nF" at -14.6,24 h1 r90
  text "10nF" at -7.8,24 h1 r90
  text "10nF" at -6.2,24 h1 r90
  text "10nF" at -4.6,24 h1 r90
  text "10nF" at -3,24 h1 r90
  text "10nF" at -1.4,24 h1 r90
  text "10nF" at 0.4,24 h1 r90
  text "10nF" at 18.6,24 h1 r90
  text "10nF" at 20.2,24 h1 r90
  text "0.1uF" at 21.9,24 h1 r90
  text "1uF" at 23.5,24 h1 r90
  text "GND" at 2,11.2 h1 r90
  text "3.3" at 4.6,11.2 h1 r90
  text "TDI" at 7.2,11.2 h1 r90
  text "TMS" at 9.8,11.2 h1 r90
  text "TCK" at 12.3,11.2 h1 r90
  text "TDO" at 14.9,11.2 h1 r90
  text "XC3S400AN FPGA BOARD" at 47.2,-11.6 h1 r90
  text "MMMI 10-2008 PCB: Caalb" at 48.7,-11.6 h1 r90
  text "1uF" at -22.4,-28 h1 r90
  text "0.1uF" at -20.8,-28 h1 r90
  text "0.1uF" at -19.2,-28 h1 r90
  text "10nF" at -17.7,-28 h1 r90
  text "10nF" at -16.2,-28 h1 r90
  text "10nF" at -14.5,-28 h1 r90
  text "10nF" at 15.5,-28 h1 r90
  text "10nF" at 17.1,-28 h1 r90
  text "10nF" at 18.7,-28 h1 r90
  text "0.1uF" at 20.5,-28 h1 r90
  text "0.1uF" at 22,-28 h1 r90
  text "1uF" at 23.6,-28 h1 r90

## Dimensions
-24.5,22.5 to -23.7,-22.5 on Top Overlay
-24.5,-22.5 to 24.5,-21.8 on Top Overlay